# EAGLE board IR Controller v2 Panel (EAGLE 9.4.2), part 1 of 2
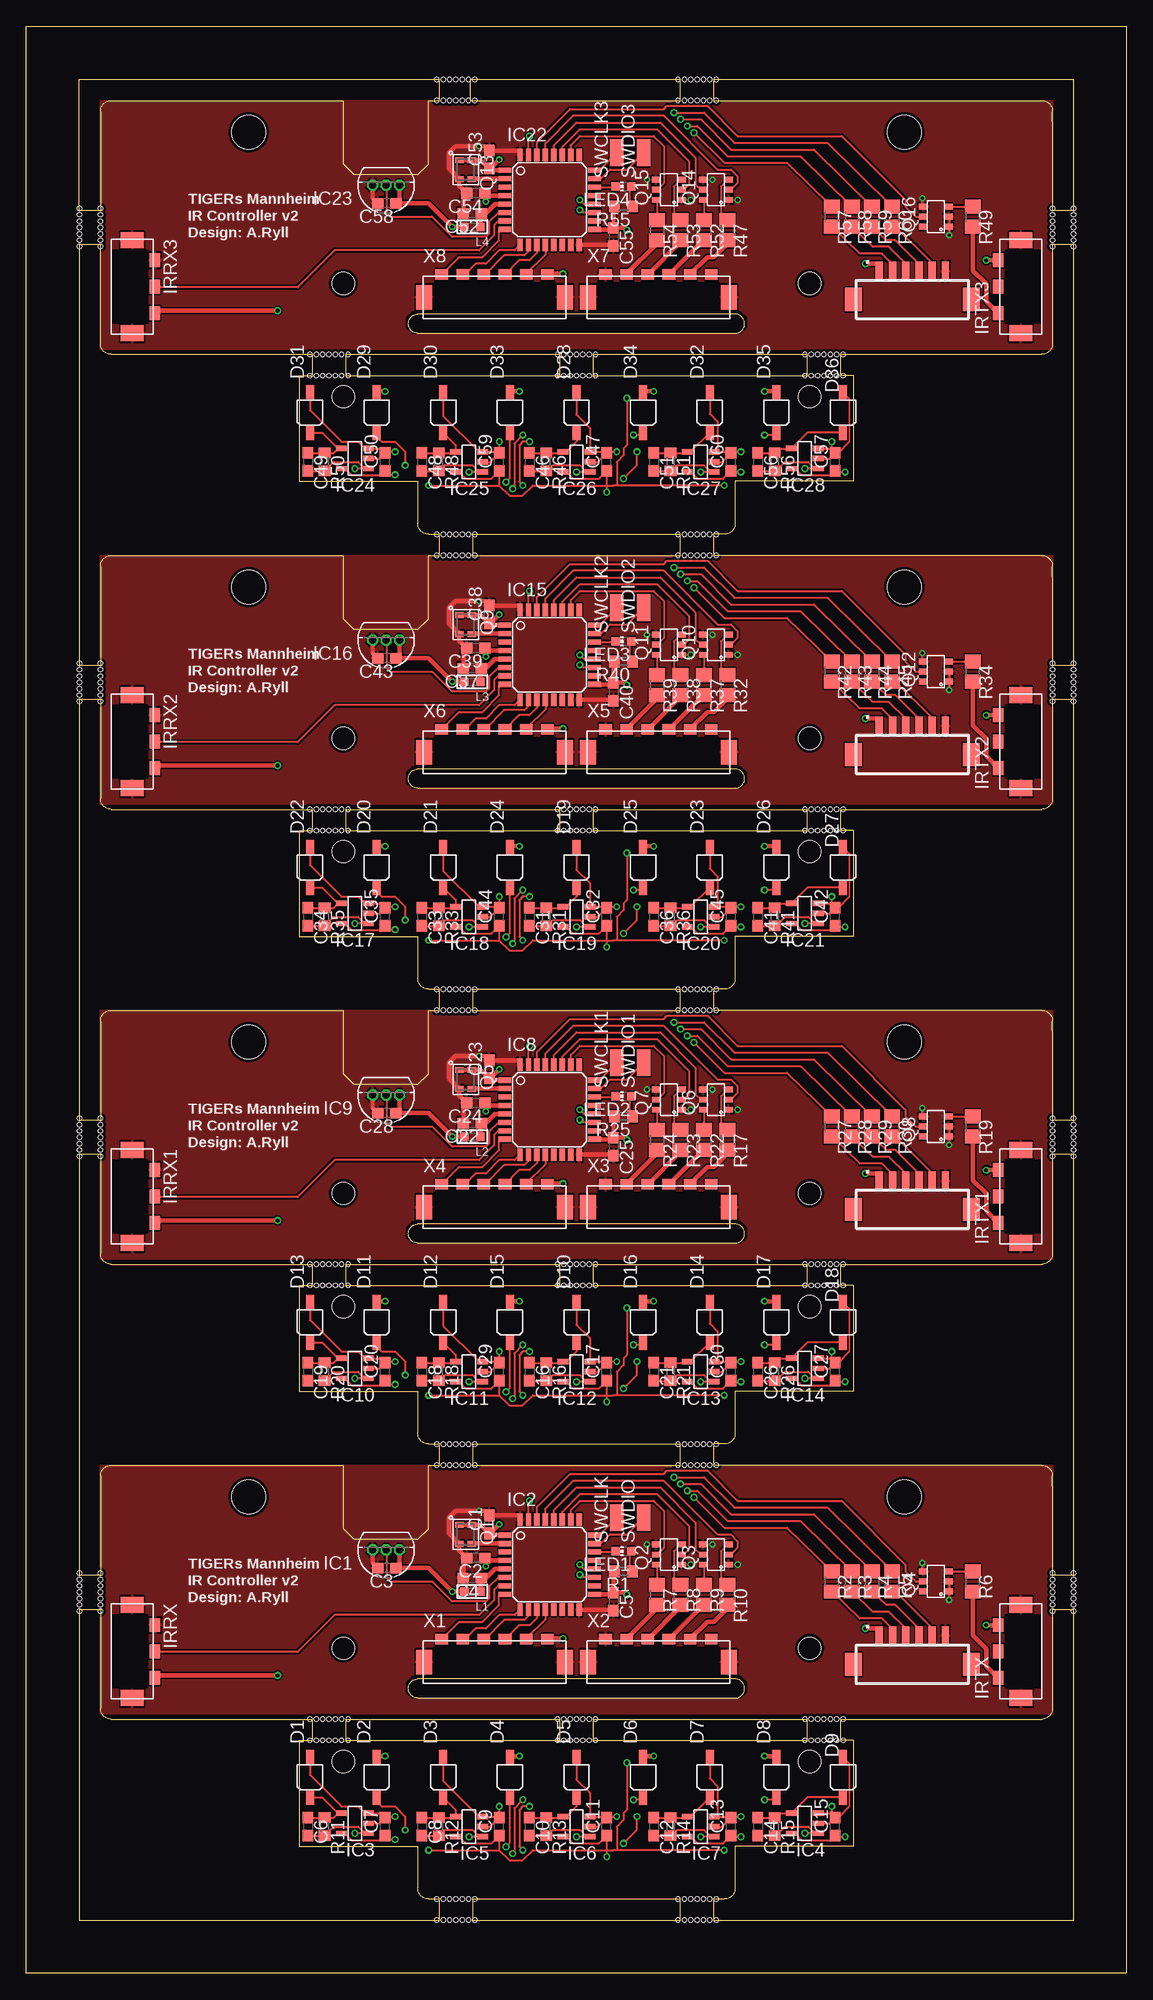
[diagram p0: board, top side]
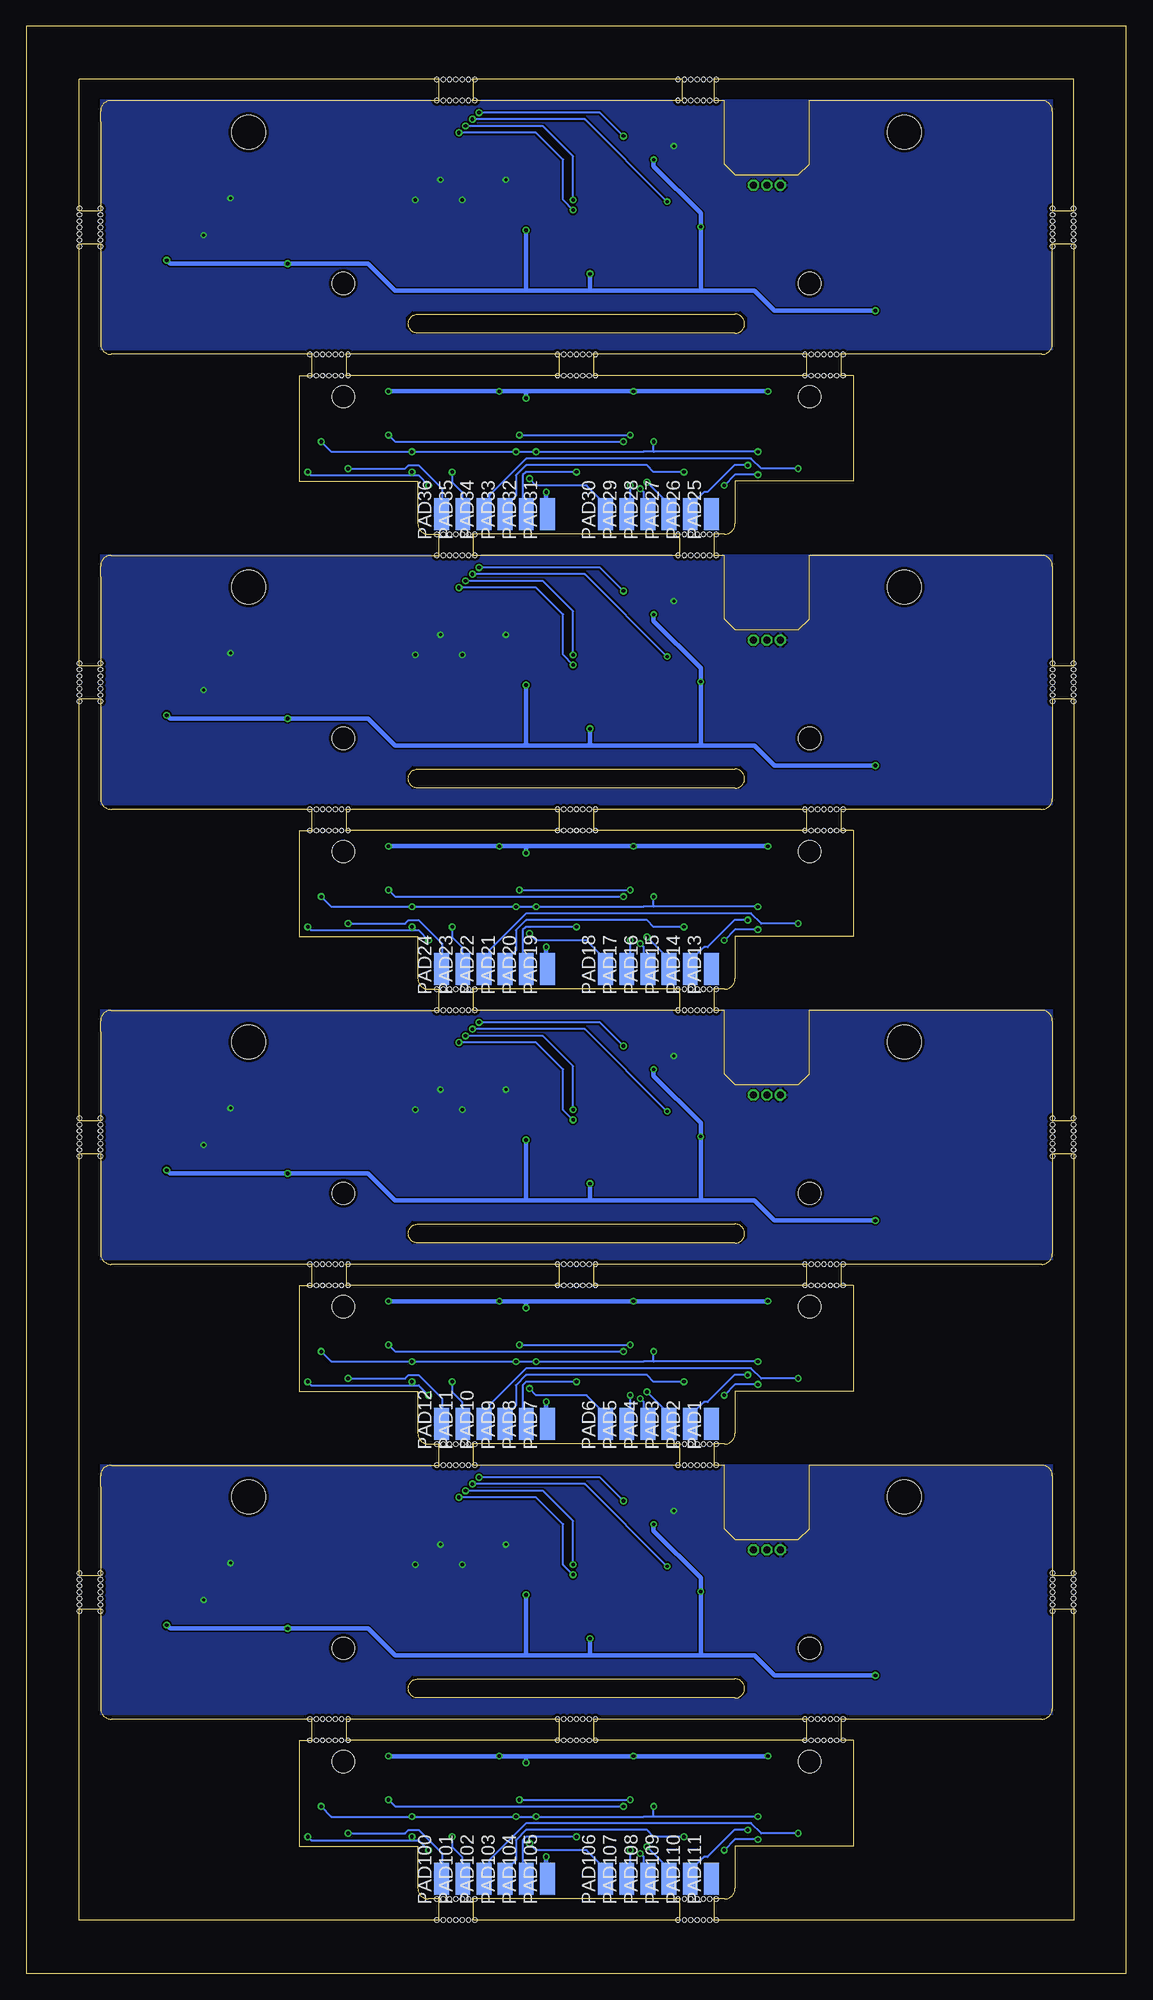
[diagram p1: board, bottom side, seen from below]

Size 104 x 184 mm. Coordinates in mm from the lower left corner, seen from the top.
Outline: 0,0 0,184 104,184 104,0 0,0
Copper layers (1*16): Top 0.035mm / dielectric 1.5mm / Bottom 0.035mm
Design rules "PCB-POOL Standard *": minimum track width 0.15mm, minimum drill 0.3mm, track to track 0.15mm, track to pad 0.15mm, pad to pad 0.15mm, via to via 0.15mm, smd to smd 0.15mm, copper to edge 0.3mm, drill to drill 0.2mm, minimum pad ring 0.2mm, minimum via ring 0.15mm, stop-mask expansion 0.075mm, vias tented up to drill 14mil, thermal gap 0.2mm
Holes 3.2 mm at 21,45 83,45 21,88 83,88 21,131 83,131 21,174 83,174
Holes 2.1 mm at 29.95,30.7 74.05,30.7 29.95,20 74.05,20 29.95,73.7 74.05,73.7 29.95,63 74.05,63 29.95,116.7 74.05,116.7 29.95,106 74.05,106 29.95,159.7 74.05,159.7 29.95,149 74.05,149
Holes 0.4 mm at 28,22 28.6,22 29.2,22 27.4,22 26.8,22 28,24 28.6,24 29.2,24 27.4,24 26.8,24 52,22 52.6,22 53.2,22 51.4,22 50.8,22 52,24 52.6,24 53.2,24 51.4,24 50.8,24 76,22 76.6,22 77.2,22 75.4,22 74.8,22 76,24 76.6,24 77.2,24 75.4,24 74.8,24 28,65 28.6,65 29.2,65 27.4,65 26.8,65 28,67 28.6,67 29.2,67 27.4,67 26.8,67 52,65 52.6,65 53.2,65 51.4,65 50.8,65 52,67 52.6,67 53.2,67 51.4,67 50.8,67 76,65 76.6,65 77.2,65 75.4,65 74.8,65 76,67 76.6,67 77.2,67 75.4,67 74.8,67 28,108 28.6,108 29.2,108 27.4,108 26.8,108 28,110 28.6,110 29.2,110 27.4,110 26.8,110 52,108 52.6,108 53.2,108 51.4,108 50.8,108 52,110 52.6,110 53.2,110 51.4,110 50.8,110 76,108 76.6,108 77.2,108 75.4,108 74.8,108 76,110 76.6,110 77.2,110 75.4,110 74.8,110 28,151 28.6,151 29.2,151 27.4,151 26.8,151 28,153 28.6,153 29.2,153 27.4,153 26.8,153 52,151 52.6,151 53.2,151 51.4,151 50.8,151 52,153 52.6,153 53.2,153 51.4,153 50.8,153 76,151 76.6,151 77.2,151 75.4,151 74.8,151 76,153 76.6,153 77.2,153 75.4,153 74.8,153 40,48 40.6,48 41.2,48 39.4,48 38.8,48 40,50 40.6,50 41.2,50 39.4,50 38.8,50 64,50 63.4,50 62.8,50 64.6,50 65.2,50 64,48 63.4,48 62.8,48 64.6,48 65.2,48 40,91 40.6,91 41.2,91 39.4,91 38.8,91 40,93 40.6,93 41.2,93 39.4,93 38.8,93 64,93 63.4,93 62.8,93 64.6,93 65.2,93 64,91 63.4,91 62.8,91 64.6,91 65.2,91 40,134 40.6,134 41.2,134 39.4,134 38.8,134 40,136 40.6,136 41.2,136 39.4,136 38.8,136 64,136 63.4,136 62.8,136 64.6,136 65.2,136 64,134 63.4,134 62.8,134 64.6,134 65.2,134 64,5 64.6,5 65.2,5 63.4,5 62.8,5 64,7 64.6,7 65.2,7 63.4,7 62.8,7 40,5 40.6,5 41.2,5 39.4,5 38.8,5 40,7 40.6,7 41.2,7 39.4,7 38.8,7 64,177 64.6,177 65.2,177 63.4,177 62.8,177 64,179 64.6,179 65.2,179 63.4,179 62.8,179 40,177 40.6,177 41.2,177 39.4,177 38.8,177 40,179 40.6,179 41.2,179 39.4,179 38.8,179 7,36 7,36.6 7,37.2 7,35.4 7,34.8 5,36 5,36.6 5,37.2 5,35.4 5,34.8 7,79 7,79.6 7,80.2 7,78.4 7,77.8 5,79 5,79.6 5,80.2 5,78.4 5,77.8 7,122 7,122.6 7,123.2 7,121.4 7,120.8 5,122 5,122.6 5,123.2 5,121.4 5,120.8 7,165 7,165.6 7,166.2 7,164.4 7,163.8 5,165 5,165.6 5,166.2 5,164.4 5,163.8 99,36 99,36.6 99,37.2 99,35.4 99,34.8 97,36 97,36.6 97,37.2 97,35.4 97,34.8 99,79 99,79.6 99,80.2 99,78.4 99,77.8 97,79 97,79.6 97,80.2 97,78.4 97,77.8 99,122 99,122.6 99,123.2 99,121.4 99,120.8 97,122 97,122.6 97,123.2 97,121.4 97,120.8 99,165 99,165.6 99,166.2 99,164.4 99,163.8 97,165 97,165.6 97,166.2 97,164.4 97,163.8 41.8,177 42.4,177 41.8,179 42.4,179 62.2,177 61.6,177 62.2,179 61.6,179 29.8,151 30.4,151 29.8,153 30.4,153 50.2,151 50.2,153 53.8,151 53.8,153 74.2,151 73.6,151 74.2,153 73.6,153 41.8,134 42.4,134 41.8,136 42.4,136 62.2,136 61.6,136 62.2,134 61.6,134 29.8,108 30.4,108 29.8,110 30.4,110 50.2,108 50.2,110 53.8,108 53.8,110 74.2,108 73.6,108 74.2,110 73.6,110 41.8,91 42.4,91 41.8,93 42.4,93 62.2,93 61.6,93 62.2,91 61.6,91 29.8,65 30.4,65 29.8,67 30.4,67 50.2,65 50.2,67 53.8,65 53.8,67 74.2,65 73.6,65 74.2,67 73.6,67 41.8,48 42.4,48 41.8,50 42.4,50 62.2,50 61.6,50 62.2,48 61.6,48 29.8,22 30.4,22 29.8,24 30.4,24 50.2,22 50.2,24 53.8,22 53.8,24 74.2,22 73.6,22 74.2,24 73.6,24 41.8,5 42.4,5 41.8,7 42.4,7 62.2,5 61.6,5 62.2,7 61.6,7 7,166.8 5,166.8 7,163.2 5,163.2 99,166.8 97,166.8 99,163.2 97,163.2 99,123.8 97,123.8 99,120.2 97,120.2 7,123.8 5,123.8 7,120.2 5,120.2 7,80.8 5,80.8 7,77.2 5,77.2 99,80.8 97,80.8 99,77.2 97,77.2 99,37.8 97,37.8 99,34.2 97,34.2 7,37.8 5,37.8 7,34.2 5,34.2
tKeepout: area 18,42 to 24,48; area 80,42 to 86,48; area 27.9,28.7 to 31.9,32.7; area 72,28.7 to 76,32.7; area 27.9,18 to 31.9,22; area 72,18 to 76,22; area 18,85 to 24,91; area 80,85 to 86,91; area 27.9,71.7 to 31.9,75.7; area 72,71.7 to 76,75.7; area 27.9,61 to 31.9,65; area 72,61 to 76,65; 12 more areas
Milling: 265 lines

## Footprints (pad centres in the part's own frame; a part is rotated, then mirrored left to right if it is on the bottom)
C0603 = smd 1.1 x 1: 1 -0.85,0; 2 0.85,0
LED-GULL = smd 1.4 x 0.75: A 1.9,0; C -1.9,0
TO92 = drill 0.65 pad 0.813 octagon: 1 1.27,0; 2 0,0; 3 -1.27,0
LQFP32-ST = smd 1.2 x 0.5: 1 -4.25,2.8; 2 -4.25,2; 3 -4.25,1.2; 4 -4.25,0.4; 5 -4.25,-0.4; 6 -4.25,-1.2; 7 -4.25,-2; 8 -4.25,-2.8; 17 4.25,-2.8; 18 4.25,-2; 19 4.25,-1.2; 20 4.25,-0.4; 21 4.25,0.4; 22 4.25,1.2; 23 4.25,2; 24 4.25,2.8 | smd 0.5 x 1.2: 9 -2.8,-4.25; 10 -2,-4.25; 11 -1.2,-4.25; 12 -0.4,-4.25; 13 0.4,-4.25; 14 1.2,-4.25; 15 2,-4.25; 16 2.8,-4.25; 25 2.8,4.25; 26 2,4.25; 27 1.2,4.25; 28 0.4,4.25; 29 -0.4,4.25; 30 -1.2,4.25; 31 -2,4.25; 32 -2.8,4.25
SOT23-5 = smd 1.016 x 0.508: 1 -1.27,0.953; 2 -1.27,0; 3 -1.27,-0.953; 4 1.27,-0.953; 5 1.27,0.953
DF13C-6P-1.25V = smd 1.6 x 2.2: M$0 5.575,-1.8; M$1 -5.575,-1.8 | smd 0.7 x 1.8: P$1 -3.125,0.9; P$2 -1.875,0.9; P$3 -0.625,0.9; P$4 0.625,0.9; P$5 1.875,0.9; P$6 3.125,0.9
AVX-CON3 = smd 1.3 x 1: 1 2.5,2.15; 2 0,2.15; 3 -2.5,2.15 | smd 1.5 x 2.15: S1 4.4,0; S2 -4.4,0
L0603 = smd 0.8 x 0.8: 1 -0.762,0; 2 0.762,0
CHIP-LED0603 = smd 0.8 x 0.8: A 0,-0.75; C 0,0.75
SMD1,4-3 = smd 1.4 x 3: 1 0,0
OSCI-KC2016 = smd 0.6 x 0.8: 1 -0.9,-0.6; 2 0.9,-0.6; 3 0.9,0.6; 4 -0.9,0.6
SOT26 = smd 0.55 x 0.8: 1 -0.95,-1.2; 2 0,-1.2; 3 0.95,-1.2; 4 0.95,1.2; 5 0,1.2; 6 -0.95,1.2
R0603 = smd 1 x 1.1: 1 -0.85,0; 2 0.85,0
R0805 = smd 1.3 x 1.5: 1 -0.95,0; 2 0.95,0
SMD1,27-2,54 = smd 1.27 x 2.54: 1 0,0
AVX-CON6-2MM = smd 1.2 x 1: 1 5,2.15; 2 3,2.15; 3 1,2.15; 4 -1,2.15; 5 -3,2.15; 6 -5,2.15 | smd 1.5 x 2.3: S1 6.65,0; S2 -6.65,0

## Placement (x,y rotation side)
C1  100n  [C0603]  43.74,42.41 90 top
C2  100n  [C0603]  42.48,39.24 180 top
C3  1u  [C0603]  34.06,38.29 180 top
C4  100n  [C0603]  42.16,37.34 180 top
C5  100n  [C0603]  55.49,35.11 270 top
C6  10p  [C0603]  26.6,13.84 270 top
C7  100n  [C0603]  33.9,13.84 90 top
C8  10p  [C0603]  37.4,13.84 270 top
C9  100n  [C0603]  44.7,13.84 90 top
C10  10p  [C0603]  47.55,13.84 270 top
C11  100n  [C0603]  54.86,13.84 90 top
C12  10p  [C0603]  59.3,13.84 270 top
C13  100n  [C0603]  66.61,13.84 90 top
C14  10p  [C0603]  69.14,13.84 270 top
C15  100n  [C0603]  76.45,13.84 90 top
C16  10p  [C0603]  47.55,56.84 270 top
C17  100n  [C0603]  54.86,56.84 90 top
C18  10p  [C0603]  37.4,56.84 270 top
C19  10p  [C0603]  26.6,56.84 270 top
C20  100n  [C0603]  33.9,56.84 90 top
C21  10p  [C0603]  59.3,56.84 270 top
C22  100n  [C0603]  42.16,80.33 180 top
C23  100n  [C0603]  43.74,85.42 90 top
C24  100n  [C0603]  42.48,82.24 180 top
C25  100n  [C0603]  55.49,78.11 270 top
C26  10p  [C0603]  69.14,56.84 270 top
C27  100n  [C0603]  76.45,56.84 90 top
C28  1u  [C0603]  34.06,81.29 180 top
C29  100n  [C0603]  44.7,56.84 90 top
C30  100n  [C0603]  66.61,56.84 90 top
C31  10p  [C0603]  47.55,99.84 270 top
C32  100n  [C0603]  54.86,99.84 90 top
C33  10p  [C0603]  37.4,99.84 270 top
C34  10p  [C0603]  26.6,99.84 270 top
C35  100n  [C0603]  33.9,99.84 90 top
C36  10p  [C0603]  59.3,99.84 270 top
C37  100n  [C0603]  42.16,123.33 180 top
C38  100n  [C0603]  43.74,128.41 90 top
C39  100n  [C0603]  42.48,125.24 180 top
C40  100n  [C0603]  55.49,121.11 270 top
C41  10p  [C0603]  69.14,99.84 270 top
C42  100n  [C0603]  76.45,99.84 90 top
C43  1u  [C0603]  34.06,124.29 180 top
C44  100n  [C0603]  44.7,99.84 90 top
C45  100n  [C0603]  66.61,99.84 90 top
C46  10p  [C0603]  47.55,142.84 270 top
C47  100n  [C0603]  54.86,142.84 90 top
C48  10p  [C0603]  37.4,142.84 270 top
C49  10p  [C0603]  26.6,142.84 270 top
C50  100n  [C0603]  33.9,142.84 90 top
C51  10p  [C0603]  59.3,142.84 270 top
C52  100n  [C0603]  42.16,166.34 180 top
C53  100n  [C0603]  43.74,171.41 90 top
C54  100n  [C0603]  42.48,168.24 180 top
C55  100n  [C0603]  55.49,164.11 270 top
C56  10p  [C0603]  69.14,142.84 270 top
C57  100n  [C0603]  76.45,142.84 90 top
C58  1u  [C0603]  34.06,167.29 180 top
C59  100n  [C0603]  44.7,142.84 90 top
C60  100n  [C0603]  66.61,142.84 90 top
D1  TEMD1020  [LED-GULL]  26.8,18.5 90 top
D2  VSMB2020X01  [LED-GULL]  33.1,18.5 90 top
D3  TEMD1020  [LED-GULL]  39.4,18.5 90 top
D4  VSMB2020X01  [LED-GULL]  45.7,18.5 90 top
D5  TEMD1020  [LED-GULL]  52,18.5 90 top
D6  VSMB2020X01  [LED-GULL]  58.3,18.5 90 top
D7  TEMD1020  [LED-GULL]  64.6,18.5 90 top
D8  VSMB2020X01  [LED-GULL]  70.9,18.5 90 top
D9  TEMD1020  [LED-GULL]  77.2,18.5 90 top
D10  TEMD1020  [LED-GULL]  52,61.5 90 top
D11  VSMB2020X01  [LED-GULL]  33.1,61.5 90 top
D12  TEMD1020  [LED-GULL]  39.4,61.5 90 top
D13  TEMD1020  [LED-GULL]  26.8,61.5 90 top
D14  TEMD1020  [LED-GULL]  64.6,61.5 90 top
D15  VSMB2020X01  [LED-GULL]  45.7,61.5 90 top
D16  VSMB2020X01  [LED-GULL]  58.3,61.5 90 top
D17  VSMB2020X01  [LED-GULL]  70.9,61.5 90 top
D18  TEMD1020  [LED-GULL]  77.2,61.5 90 top
D19  TEMD1020  [LED-GULL]  52,104.5 90 top
D20  VSMB2020X01  [LED-GULL]  33.1,104.5 90 top
D21  TEMD1020  [LED-GULL]  39.4,104.5 90 top
D22  TEMD1020  [LED-GULL]  26.8,104.5 90 top
D23  TEMD1020  [LED-GULL]  64.6,104.5 90 top
D24  VSMB2020X01  [LED-GULL]  45.7,104.5 90 top
D25  VSMB2020X01  [LED-GULL]  58.3,104.5 90 top
D26  VSMB2020X01  [LED-GULL]  70.9,104.5 90 top
D27  TEMD1020  [LED-GULL]  77.2,104.5 90 top
D28  TEMD1020  [LED-GULL]  52,147.5 90 top
D29  VSMB2020X01  [LED-GULL]  33.1,147.5 90 top
D30  TEMD1020  [LED-GULL]  39.4,147.5 90 top
D31  TEMD1020  [LED-GULL]  26.8,147.5 90 top
D32  TEMD1020  [LED-GULL]  64.6,147.5 90 top
D33  VSMB2020X01  [LED-GULL]  45.7,147.5 90 top
D34  VSMB2020X01  [LED-GULL]  58.3,147.5 90 top
D35  VSMB2020X01  [LED-GULL]  70.9,147.5 90 top
D36  TEMD1020  [LED-GULL]  77.2,147.5 90 top
IC1  MCP9701A  [TO92]  34,40 180 top
IC2  STM32F031K6T6  [LQFP32-ST]  49.46,38.6 0 top
IC3  OPA320  [SOT23-5]  31.05,14.16 180 top
IC4  OPA320  [SOT23-5]  73.59,14.16 180 top
IC5  OPA320  [SOT23-5]  41.84,13.84 180 top
IC6  OPA320  [SOT23-5]  52,13.84 180 top
IC7  OPA320  [SOT23-5]  63.75,13.84 180 top
IC8  STM32F031K6T6  [LQFP32-ST]  49.46,81.61 0 top
IC9  MCP9701A  [TO92]  34,83 180 top
IC10  OPA320  [SOT23-5]  31.05,57.16 180 top
IC11  OPA320  [SOT23-5]  41.84,56.84 180 top
IC12  OPA320  [SOT23-5]  52,56.84 180 top
IC13  OPA320  [SOT23-5]  63.75,56.84 180 top
IC14  OPA320  [SOT23-5]  73.59,57.16 180 top
IC15  STM32F031K6T6  [LQFP32-ST]  49.46,124.61 0 top
IC16  MCP9701A  [TO92]  34,126 180 top
IC17  OPA320  [SOT23-5]  31.05,100.16 180 top
IC18  OPA320  [SOT23-5]  41.84,99.84 180 top
IC19  OPA320  [SOT23-5]  52,99.84 180 top
IC20  OPA320  [SOT23-5]  63.75,99.84 180 top
IC21  OPA320  [SOT23-5]  73.59,100.16 180 top
IC22  STM32F031K6T6  [LQFP32-ST]  49.46,167.6 0 top
IC23  MCP9701A  [TO92]  34,169 180 top
IC24  OPA320  [SOT23-5]  31.05,143.16 180 top
IC25  OPA320  [SOT23-5]  41.84,142.84 180 top
IC26  OPA320  [SOT23-5]  52,142.84 180 top
IC27  OPA320  [SOT23-5]  63.75,142.84 180 top
IC28  OPA320  [SOT23-5]  73.59,143.16 180 top
IR  DF13-6P-1.25V  [DF13C-6P-1.25V]  83.75,30.98 0 top
IR1  DF13-6P-1.25V  [DF13C-6P-1.25V]  83.75,73.98 0 top
IR2  DF13-6P-1.25V  [DF13C-6P-1.25V]  83.75,116.98 0 top
IR3  DF13-6P-1.25V  [DF13C-6P-1.25V]  83.75,159.99 0 top
IRRX  009155003541006  [AVX-CON3]  10,30.4 270 top
IRRX1  009155003541006  [AVX-CON3]  10,73.4 270 top
IRRX2  009155003541006  [AVX-CON3]  10,116.4 270 top
IRRX3  009155003541006  [AVX-CON3]  10,159.4 270 top
IRTX  009155003541006  [AVX-CON3]  94,30.4 90 top
IRTX1  009155003541006  [AVX-CON3]  94,73.4 90 top
IRTX2  009155003541006  [AVX-CON3]  94,116.4 90 top
IRTX3  009155003541006  [AVX-CON3]  94,159.4 90 top
L1  120R  [L0603]  42.16,36.06 180 top
L2  120R  [L0603]  42.16,79.06 180 top
L3  120R  [L0603]  42.16,122.06 180 top
L4  120R  [L0603]  42.16,165.06 180 top
LED1  gr  [CHIP-LED0603]  56.45,39.88 90 top
LED2  gr  [CHIP-LED0603]  56.45,82.88 90 top
LED3  gr  [CHIP-LED0603]  56.45,125.88 90 top
LED4  gr  [CHIP-LED0603]  56.45,168.88 90 top
PAD1  [SMD1,4-3]  39.25,51.9 0 bottom
PAD2  [SMD1,4-3]  41.25,51.9 0 bottom
PAD3  [SMD1,4-3]  43.25,51.9 0 bottom
PAD4  [SMD1,4-3]  45.25,51.9 0 bottom
PAD5  [SMD1,4-3]  47.25,51.9 0 bottom
PAD6  [SMD1,4-3]  49.25,51.9 0 bottom
PAD7  [SMD1,4-3]  54.75,51.9 0 bottom
PAD8  [SMD1,4-3]  56.75,51.9 0 bottom
PAD9  [SMD1,4-3]  58.75,51.9 0 bottom
PAD10  [SMD1,4-3]  60.75,51.9 0 bottom
PAD11  [SMD1,4-3]  62.75,51.9 0 bottom
PAD12  [SMD1,4-3]  64.75,51.9 0 bottom
PAD13  [SMD1,4-3]  39.25,94.9 0 bottom
PAD14  [SMD1,4-3]  41.25,94.9 0 bottom
PAD15  [SMD1,4-3]  43.25,94.9 0 bottom
PAD16  [SMD1,4-3]  45.25,94.9 0 bottom
PAD17  [SMD1,4-3]  47.25,94.9 0 bottom
PAD18  [SMD1,4-3]  49.25,94.9 0 bottom
PAD19  [SMD1,4-3]  54.75,94.9 0 bottom
PAD20  [SMD1,4-3]  56.75,94.9 0 bottom
PAD21  [SMD1,4-3]  58.75,94.9 0 bottom
PAD22  [SMD1,4-3]  60.75,94.9 0 bottom
PAD23  [SMD1,4-3]  62.75,94.9 0 bottom
PAD24  [SMD1,4-3]  64.75,94.9 0 bottom
PAD25  [SMD1,4-3]  39.25,137.9 0 bottom
PAD26  [SMD1,4-3]  41.25,137.9 0 bottom
PAD27  [SMD1,4-3]  43.25,137.9 0 bottom
PAD28  [SMD1,4-3]  45.25,137.9 0 bottom
PAD29  [SMD1,4-3]  47.25,137.9 0 bottom
PAD30  [SMD1,4-3]  49.25,137.9 0 bottom
PAD31  [SMD1,4-3]  54.75,137.9 0 bottom
PAD32  [SMD1,4-3]  56.75,137.9 0 bottom
PAD33  [SMD1,4-3]  58.75,137.9 0 bottom
PAD34  [SMD1,4-3]  60.75,137.9 0 bottom
PAD35  [SMD1,4-3]  62.75,137.9 0 bottom
PAD36  [SMD1,4-3]  64.75,137.9 0 bottom
PAD100  [SMD1,4-3]  64.75,8.9 0 bottom
PAD101  [SMD1,4-3]  62.75,8.9 0 bottom
PAD102  [SMD1,4-3]  60.75,8.9 0 bottom
PAD103  [SMD1,4-3]  58.75,8.9 0 bottom
PAD104  [SMD1,4-3]  56.75,8.9 0 bottom
PAD105  [SMD1,4-3]  54.75,8.9 0 bottom
PAD106  [SMD1,4-3]  49.25,8.9 0 bottom
PAD107  [SMD1,4-3]  47.25,8.9 0 bottom
PAD108  [SMD1,4-3]  45.25,8.9 0 bottom
PAD109  [SMD1,4-3]  43.25,8.9 0 bottom
PAD110  [SMD1,4-3]  41.25,8.9 0 bottom
PAD111  [SMD1,4-3]  39.25,8.9 0 bottom
Q1  KC2016K4.00000C1GE00  [OSCI-KC2016]  41.52,41.46 270 top
Q2  DMN5L06DMK-7  [SOT26]  60.73,39.56 90 top
Q3  DMN5L06DMK-7  [SOT26]  65.18,39.56 90 top
Q4  DMN5L06DMK-7  [SOT26]  85.97,37.02 90 top
Q5  KC2016K4.00000C1GE00  [OSCI-KC2016]  41.52,84.46 270 top
Q6  DMN5L06DMK-7  [SOT26]  65.18,82.56 90 top
Q7  DMN5L06DMK-7  [SOT26]  60.73,82.56 90 top
Q8  DMN5L06DMK-7  [SOT26]  85.97,80.02 90 top
Q9  KC2016K4.00000C1GE00  [OSCI-KC2016]  41.52,127.46 270 top
Q10  DMN5L06DMK-7  [SOT26]  65.18,125.56 90 top
Q11  DMN5L06DMK-7  [SOT26]  60.73,125.56 90 top
Q12  DMN5L06DMK-7  [SOT26]  85.97,123.02 90 top
Q13  KC2016K4.00000C1GE00  [OSCI-KC2016]  41.52,170.46 270 top
Q14  DMN5L06DMK-7  [SOT26]  65.18,168.56 90 top
Q15  DMN5L06DMK-7  [SOT26]  60.73,168.56 90 top
Q16  DMN5L06DMK-7  [SOT26]  85.97,166.02 90 top
R1  1k  [R0603]  56.45,37.97 180 top
R2  47  [R0805]  76.13,37.02 270 top
R3  47  [R0805]  78.03,37.02 270 top
R4  47  [R0805]  79.94,37.02 270 top
R5  47  [R0805]  81.84,37.02 270 top
R6  47  [R0805]  89.47,37.02 270 top
R7  47  [R0805]  59.62,35.75 270 top
R8  47  [R0805]  61.84,35.75 270 top
R9  47  [R0805]  64.06,35.75 270 top
R10  47  [R0805]  66.29,35.75 270 top
R11  1M  [R0603]  28.19,13.84 270 top
R12  1M  [R0603]  38.98,13.84 270 top
R13  1M  [R0603]  49.14,13.84 270 top
R14  1M  [R0603]  60.89,13.84 270 top
R15  1M  [R0603]  70.73,13.84 270 top
R16  1M  [R0603]  49.14,56.84 270 top
R17  47  [R0805]  66.29,78.75 270 top
R18  1M  [R0603]  38.98,56.84 270 top
R19  47  [R0805]  89.47,80.02 270 top
R20  1M  [R0603]  28.19,56.84 270 top
R21  1M  [R0603]  60.89,56.84 270 top
R22  47  [R0805]  64.06,78.75 270 top
R23  47  [R0805]  61.84,78.75 270 top
R24  47  [R0805]  59.62,78.75 270 top
R25  1k  [R0603]  56.45,80.97 180 top
R26  1M  [R0603]  70.73,56.84 270 top
R27  47  [R0805]  76.13,80.02 270 top
R28  47  [R0805]  78.03,80.02 270 top
R29  47  [R0805]  79.94,80.02 270 top
R30  47  [R0805]  81.84,80.02 270 top
R31  1M  [R0603]  49.14,99.84 270 top
R32  47  [R0805]  66.29,121.75 270 top
R33  1M  [R0603]  38.98,99.84 270 top
R34  47  [R0805]  89.47,123.02 270 top
R35  1M  [R0603]  28.19,99.84 270 top
R36  1M  [R0603]  60.89,99.84 270 top
R37  47  [R0805]  64.06,121.75 270 top
R38  47  [R0805]  61.84,121.75 270 top
R39  47  [R0805]  59.62,121.75 270 top
R40  1k  [R0603]  56.45,123.97 180 top
R41  1M  [R0603]  70.73,99.84 270 top
R42  47  [R0805]  76.13,123.02 270 top
R43  47  [R0805]  78.03,123.02 270 top
R44  47  [R0805]  79.94,123.02 270 top
R45  47  [R0805]  81.84,123.02 270 top
R46  1M  [R0603]  49.14,142.84 270 top
R47  47  [R0805]  66.29,164.75 270 top
R48  1M  [R0603]  38.98,142.84 270 top
R49  47  [R0805]  89.47,166.02 270 top
R50  1M  [R0603]  28.19,142.84 270 top
R51  1M  [R0603]  60.89,142.84 270 top
R52  47  [R0805]  64.06,164.75 270 top
R53  47  [R0805]  61.84,164.75 270 top
R54  47  [R0805]  59.62,164.75 270 top
R55  1k  [R0603]  56.45,166.97 180 top
R56  1M  [R0603]  70.73,142.84 270 top
R57  47  [R0805]  76.13,166.02 270 top
R58  47  [R0805]  78.03,166.02 270 top
R59  47  [R0805]  79.94,166.02 270 top
R60  47  [R0805]  81.84,166.02 270 top
SWCLK  [SMD1,27-2,54]  55.81,43.05 0 top
SWCLK1  [SMD1,27-2,54]  55.81,86.05 0 top
SWCLK2  [SMD1,27-2,54]  55.81,129.05 0 top
SWCLK3  [SMD1,27-2,54]  55.81,172.05 0 top
SWDIO  [SMD1,27-2,54]  58.35,43.05 0 top
SWDIO1  [SMD1,27-2,54]  58.35,86.05 0 top
SWDIO2  [SMD1,27-2,54]  58.35,129.05 0 top
SWDIO3  [SMD1,27-2,54]  58.35,172.05 0 top
X1  00-9155-006-741-006  [AVX-CON6-2MM]  44.25,29.4 0 top
X2  00-9155-006-741-006  [AVX-CON6-2MM]  59.75,29.4 0 top
X3  00-9155-006-741-006  [AVX-CON6-2MM]  59.75,72.4 0 top
X4  00-9155-006-741-006  [AVX-CON6-2MM]  44.25,72.4 0 top
X5  00-9155-006-741-006  [AVX-CON6-2MM]  59.75,115.4 0 top
X6  00-9155-006-741-006  [AVX-CON6-2MM]  44.25,115.4 0 top
X7  00-9155-006-741-006  [AVX-CON6-2MM]  59.75,158.4 0 top
X8  00-9155-006-741-006  [AVX-CON6-2MM]  44.25,158.4 0 top

## Library data of the parts
C1-C60 = rcl; SPICEPREFIX: C
D1-D36 IC1-IC28 IRRX IRRX1-IRRX3 IRTX IRTX1-IRTX3 PAD1-PAD36 PAD100-PAD111 Q1-Q16 SWCLK SWCLK1-SWCLK3 SWDIO SWDIO1-SWDIO3 X1-X8 = TIGERs
IR IR1-IR3 = con-hirose-df13
L1-L4 = rc-master-smd
LED1-LED4 = led; SPICEPREFIX: D
R1-R60 = rcl; SPICEPREFIX: R

## Nets
+3V1: C23.1 C25.1 C28.1 IC8.1 IC8.17 IC9.3 IR1.P$1 IRRX1.1 IRTX1.1 L2.2 Q5.1 Q5.4 R25.2 X4.1
+3V2: C38.1 C40.1 C43.1 IC15.1 IC15.17 IC16.3 IR2.P$1 IRRX2.1 IRTX2.1 L3.2 Q9.1 Q9.4 R40.2 X6.1
+3V3: C1.1 C3.1 C5.1 IC1.3 IC2.1 IC2.17 IR.P$1 IRRX.1 IRTX.1 L1.2 Q1.1 Q1.4 R1.2 X1.1
+3V4: C53.1 C55.1 C58.1 IC22.1 IC22.17 IC23.3 IR3.P$1 IRRX3.1 IRTX3.1 L4.2 Q13.1 Q13.4 R55.2 X8.1
BOOT1: IC8.31 R30.1
BOOT2: IC15.31 R45.1
BOOT3: IC22.31 R60.1
BOOT5: IC2.31 R5.1
GND: C1.2 C2.2 C3.2 C4.2 C5.2 IC1.1 IC2.16 IC2.32 IR.P$6 IRRX.3 IRRX.S1 IRRX.S2 IRTX.S1 IRTX.S2 Q1.2 Q2.1 Q2.4 Q3.1 Q3.4 Q4.1 Q4.2 Q4.4 X1.S1 X1.S2 X2.6 X2.S1 X2.S2
GND1: C22.2 C23.2 C24.2 C25.2 C28.2 IC8.16 IC8.32 IC9.1 IR1.P$6 IRRX1.3 IRRX1.S1 IRRX1.S2 IRTX1.S1 IRTX1.S2 Q5.2 Q6.1 Q6.4 Q7.1 Q7.4 Q8.1 Q8.2 Q8.4 X3.6 X3.S1 X3.S2 X4.S1 X4.S2
GND2: C37.2 C38.2 C39.2 C40.2 C43.2 IC15.16 IC15.32 IC16.1 IR2.P$6 IRRX2.3 IRRX2.S1 IRRX2.S2 IRTX2.S1 IRTX2.S2 Q9.2 Q10.1 Q10.4 Q11.1 Q11.4 Q12.1 Q12.2 Q12.4 X5.6 X5.S1 X5.S2 X6.S1 X6.S2
GND3: C52.2 C53.2 C54.2 C55.2 C58.2 IC22.16 IC22.32 IC23.1 IR3.P$6 IRRX3.3 IRRX3.S1 IRRX3.S2 IRTX3.S1 IRTX3.S2 Q13.2 Q14.1 Q14.4 Q15.1 Q15.4 Q16.1 Q16.2 Q16.4 X7.6 X7.S1 X7.S2 X8.S1 X8.S2
GNDA: C7.2 C9.2 C11.2 C13.2 C15.2 D1.A D3.A D5.A D7.A D9.A IC3.2 IC3.3 IC4.2 IC4.3 IC5.2 IC5.3 IC6.2 IC6.3 IC7.2 IC7.3 PAD106.1
GNDA1: C17.2 C20.2 C27.2 C29.2 C30.2 D10.A D12.A D13.A D14.A D18.A IC10.2 IC10.3 IC11.2 IC11.3 IC12.2 IC12.3 IC13.2 IC13.3 IC14.2 IC14.3 PAD6.1
GNDA2: C32.2 C35.2 C42.2 C44.2 C45.2 D19.A D21.A D22.A D23.A D27.A IC17.2 IC17.3 IC18.2 IC18.3 IC19.2 IC19.3 IC20.2 IC20.3 IC21.2 IC21.3 PAD18.1
GNDA3: C47.2 C50.2 C57.2 C59.2 C60.2 D28.A D30.A D31.A D32.A D36.A IC24.2 IC24.3 IC25.2 IC25.3 IC26.2 IC26.3 IC27.2 IC27.3 IC28.2 IC28.3 PAD30.1
IR0: IC2.30 Q4.5
IR1: IC2.26 Q2.5
IR2: IC2.29 Q3.2
IR3: IC2.28 Q3.5
IR4: IC2.27 Q2.2
IR5: IC8.28 Q6.5
IR6: IC8.30 Q8.5
IR7: IC8.29 Q6.2
IR8: IC8.26 Q7.5
IR9: IC8.27 Q7.2
IR10: IC15.28 Q10.5
IR11: IC15.30 Q12.5
IR12: IC15.29 Q10.2
IR13: IC15.26 Q11.5
IR14: IC15.27 Q11.2
IR15: IC22.28 Q14.5
IR16: IC22.30 Q16.5
IR17: IC22.29 Q14.2
IR18: IC22.26 Q15.5
IR19: IC22.27 Q15.2
IR-ADC0: IC2.7 IRRX.2
IR-ADC1: IC2.12 X1.2
IR-ADC2: IC2.11 X1.3
IR-ADC3: IC2.10 X1.4
IR-ADC4: IC2.9 X1.5
IR-ADC5: IC2.8 X1.6
IR-ADC6: IC8.12 X4.2
IR-ADC7: IC8.7 IRRX1.2
IR-ADC8: IC8.11 X4.3
IR-ADC9: IC8.10 X4.4
IR-ADC10: IC8.9 X4.5
IR-ADC11: IC8.8 X4.6
IR-ADC12: IC15.12 X6.2
IR-ADC13: IC15.7 IRRX2.2
IR-ADC14: IC15.11 X6.3
IR-ADC15: IC15.10 X6.4
IR-ADC16: IC15.9 X6.5
IR-ADC17: IC15.8 X6.6
IR-ADC18: IC22.12 X8.2
IR-ADC19: IC22.7 IRRX3.2
IR-ADC20: IC22.11 X8.3
IR-ADC21: IC22.10 X8.4
IR-ADC22: IC22.9 X8.5
IR-ADC23: IC22.8 X8.6
IR-L1: D2.C PAD110.1
IR-L2: D4.C PAD109.1
IR-L3: D6.C PAD108.1
IR-L4: D8.C PAD107.1
IR-L5: D11.C PAD2.1
IR-L6: D15.C PAD3.1
IR-L7: D16.C PAD4.1
IR-L8: D17.C PAD5.1
IR-L9: D20.C PAD14.1
IR-L10: D24.C PAD15.1
IR-L11: D25.C PAD16.1
IR-L12: D26.C PAD17.1
IR-L13: D29.C PAD26.1
IR-L14: D33.C PAD27.1
IR-L15: D34.C PAD28.1
IR-L16: D35.C PAD29.1
IR-LED: IC2.22 LED1.C
IR-LED1: R8.2 X2.4
IR-LED2: R9.2 X2.3
IR-LED3: R10.2 X2.2
IR-LED4: R7.2 X2.5
IR-LED5: IC8.22 LED2.C
IR-LED6: R23.2 X3.4
IR-LED7: R22.2 X3.3
IR-LED8: R17.2 X3.2
IR-LED9: R24.2 X3.5
IR-LED10: IC15.22 LED3.C
IR-LED11: R38.2 X5.4
IR-LED12: R37.2 X5.3
IR-LED13: R32.2 X5.2
IR-LED14: R39.2 X5.5
IR-LED15: IC22.22 LED4.C
IR-LED16: R53.2 X7.4
IR-LED17: R52.2 X7.3
IR-LED18: R47.2 X7.2
IR-LED19: R54.2 X7.5
IR-OUT1: C6.2 IC3.1 PAD102.1 R11.2
IR-OUT2: C8.2 IC5.1 PAD103.1 R12.2
IR-OUT3: C10.2 IC6.1 PAD104.1 R13.2
IR-OUT4: C12.2 IC7.1 PAD101.1 R14.2
IR-OUT5: C14.2 IC4.1 PAD100.1 R15.2
IR-OUT6: C19.2 IC10.1 PAD10.1 R20.2
IR-OUT7: C18.2 IC11.1 PAD9.1 R18.2
IR-OUT8: C16.2 IC12.1 PAD8.1 R16.2
IR-OUT9: C21.2 IC13.1 PAD11.1 R21.2
IR-OUT10: C26.2 IC14.1 PAD12.1 R26.2
IR-OUT11: C34.2 IC17.1 PAD22.1 R35.2
IR-OUT12: C33.2 IC18.1 PAD21.1 R33.2
IR-OUT13: C31.2 IC19.1 PAD20.1 R31.2
IR-OUT14: C36.2 IC20.1 PAD23.1 R36.2
IR-OUT15: C41.2 IC21.1 PAD24.1 R41.2
IR-OUT16: C49.2 IC24.1 PAD34.1 R50.2
IR-OUT17: C48.2 IC25.1 PAD33.1 R48.2
IR-OUT18: C46.2 IC26.1 PAD32.1 R46.2
IR-OUT19: C51.2 IC27.1 PAD35.1 R51.2
IR-OUT20: C56.2 IC28.1 PAD36.1 R56.2
N$1: IR.P$4 R4.2
N$2: IC2.23 SWDIO.1
N$3: C16.1 D10.C IC12.4 R16.1
N$4: IR.P$5 R5.2
N$5: Q6.3 R17.1
N$6: IC2.24 SWCLK.1
N$7: Q8.3 R19.1
N$8: IRTX1.3 R19.2
N$9: C14.1 D9.C IC4.4 R15.1
N$10: C18.1 D12.C IC11.4 R18.1
N$11: C19.1 D13.C IC10.4 R20.1
N$12: C21.1 D14.C IC13.4 R21.1
N$13: Q6.6 R22.1
N$14: Q7.3 R23.1
N$15: Q7.6 R24.1
N$16: C22.1 IC8.5 L2.1
N$17: IC8.2 Q5.3
N$18: LED2.A R25.1
N$19: IR1.P$4 R29.2
N$20: IR1.P$5 R30.2
N$21: IC8.24 SWCLK1.1
N$22: IC8.23 SWDIO1.1
N$23: C26.1 D18.C IC14.4 R26.1
N$24: C31.1 D19.C IC19.4 R31.1
N$25: Q10.3 R32.1
N$26: Q12.3 R34.1
N$27: IRTX2.3 R34.2
N$28: C33.1 D21.C IC18.4 R33.1
N$29: C34.1 D22.C IC17.4 R35.1
N$30: C36.1 D23.C IC20.4 R36.1
N$31: Q10.6 R37.1
N$32: Q11.3 R38.1
N$33: Q11.6 R39.1
N$34: C37.1 IC15.5 L3.1
N$35: IC15.2 Q9.3
N$36: LED3.A R40.1
N$37: IR2.P$4 R44.2
N$38: IR2.P$5 R45.2
N$39: IC15.24 SWCLK2.1
N$40: IC15.23 SWDIO2.1
N$41: C41.1 D27.C IC21.4 R41.1
N$42: C46.1 D28.C IC26.4 R46.1
N$43: Q14.3 R47.1
N$44: Q16.3 R49.1
N$45: IRTX3.3 R49.2
N$46: C48.1 D30.C IC25.4 R48.1
N$47: C49.1 D31.C IC24.4 R50.1
N$48: C51.1 D32.C IC27.4 R51.1
N$49: Q14.6 R52.1
N$50: Q15.3 R53.1
N$51: C10.1 D5.C IC6.4 R13.1
N$52: C8.1 D3.C IC5.4 R12.1
N$53: Q15.6 R54.1
N$54: C52.1 IC22.5 L4.1
N$55: Q3.3 R10.1
N$56: IC22.2 Q13.3
N$57: C6.1 D1.C IC3.4 R11.1
N$58: LED4.A R55.1
N$59: IC2.2 Q1.3
N$60: IR3.P$4 R59.2
N$61: IR3.P$5 R60.2
N$62: IC22.24 SWCLK3.1
N$63: IC22.23 SWDIO3.1
N$64: C56.1 D36.C IC28.4 R56.1
N$65: C4.1 IC2.5 L1.1
N$66: IRTX.3 R6.2
N$68: C12.1 D7.C IC7.4 R14.1
N$69: Q4.3 R6.1
N$113: Q3.6 R9.1
N$115: Q2.3 R8.1
N$117: Q2.6 R7.1
N$122: LED1.A R1.1
SRST1: C24.1 IC8.4 R29.1
SRST2: C39.1 IC15.4 R44.1
SRST3: C54.1 IC22.4 R59.1
SRST5: C2.1 IC2.4 R4.1
T-ADC: IC1.2 IC2.6
T-ADC1: IC8.6 IC9.2
T-ADC2: IC15.6 IC16.2
T-ADC3: IC22.6 IC23.2
UART5-RX: IR.P$2 R2.2
UART5-RX1: IR1.P$2 R27.2
UART5-RX2: IR2.P$2 R42.2
UART5-RX3: IR3.P$2 R57.2
UART5-TX: IR.P$3 R3.2
UART5-TX1: IR1.P$3 R28.2
UART5-TX2: IR2.P$3 R43.2
UART5-TX3: IR3.P$3 R58.2
USART1-RX: IC2.20 R3.1
USART1-RX1: IC8.20 R28.1
USART1-RX2: IC15.20 R43.1
USART1-RX3: IC22.20 R58.1
USART1-TX: IC2.19 R2.1
USART1-TX1: IC8.19 R27.1
USART1-TX2: IC15.19 R42.1
USART1-TX3: IC22.19 R57.1
VCCINT: C7.1 C9.1 C11.1 C13.1 C15.1 D2.A D4.A D6.A D8.A IC3.5 IC4.5 IC5.5 IC6.5 IC7.5 PAD105.1
VCCINT1: C17.1 C20.1 C27.1 C29.1 C30.1 D11.A D15.A D16.A D17.A IC10.5 IC11.5 IC12.5 IC13.5 IC14.5 PAD7.1
VCCINT2: C32.1 C35.1 C42.1 C44.1 C45.1 D20.A D24.A D25.A D26.A IC17.5 IC18.5 IC19.5 IC20.5 IC21.5 PAD19.1
VCCINT3: C47.1 C50.1 C57.1 C59.1 C60.1 D29.A D33.A D34.A D35.A IC24.5 IC25.5 IC26.5 IC27.5 IC28.5 PAD31.1